# EAGLE board pcb (EAGLE 5.11)
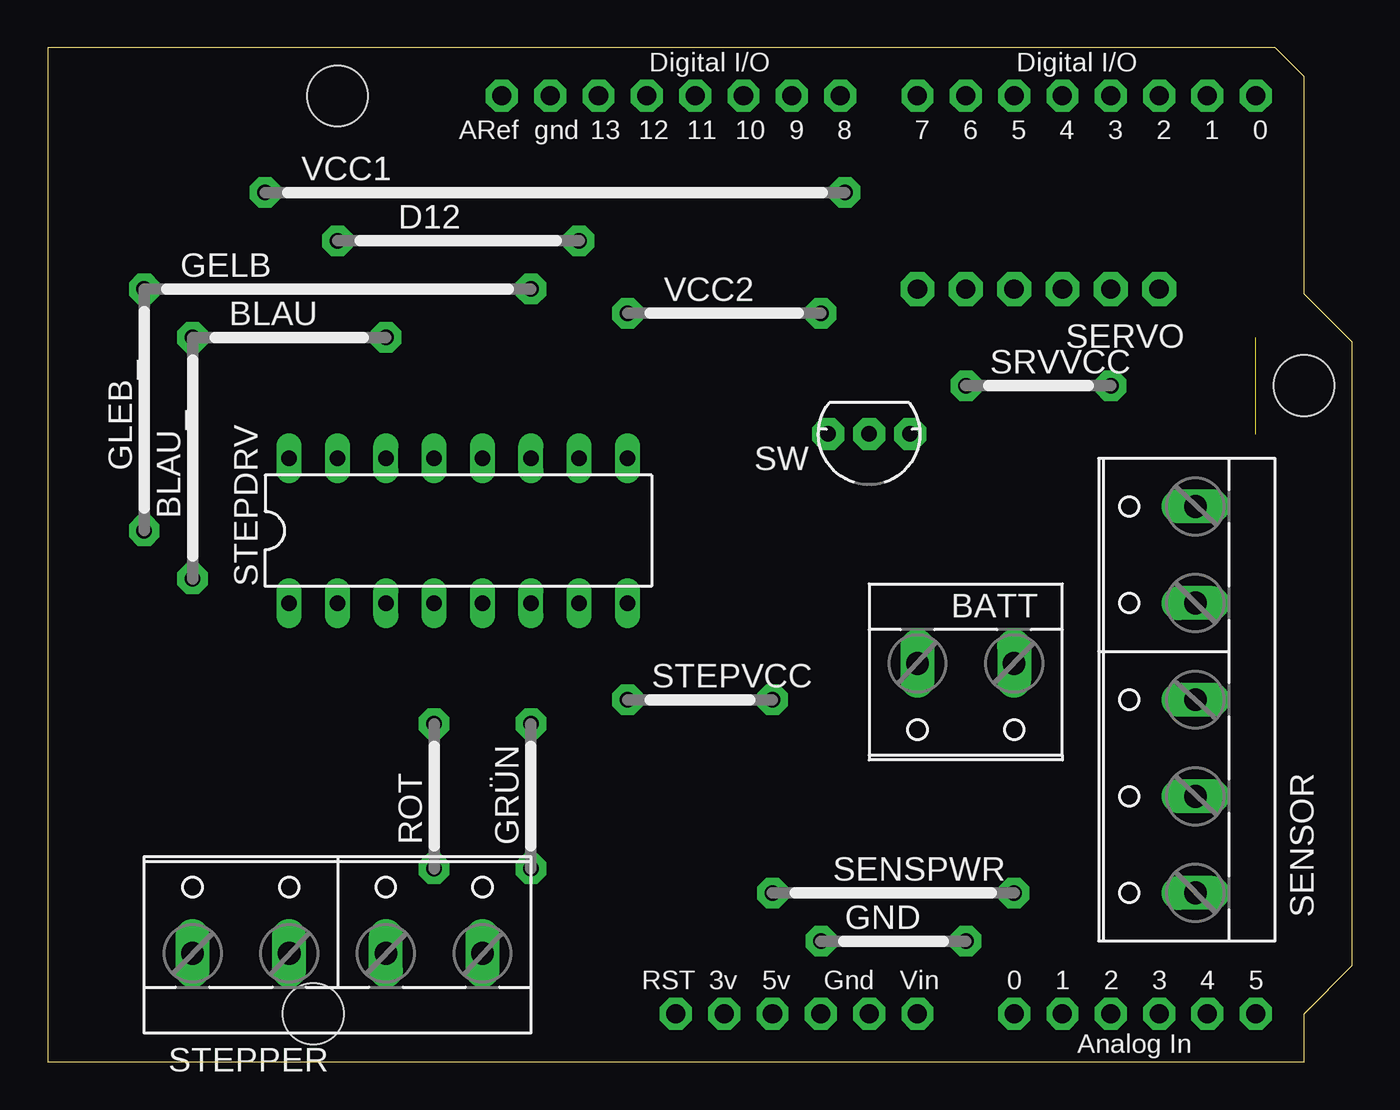
[diagram p0: board, top side]
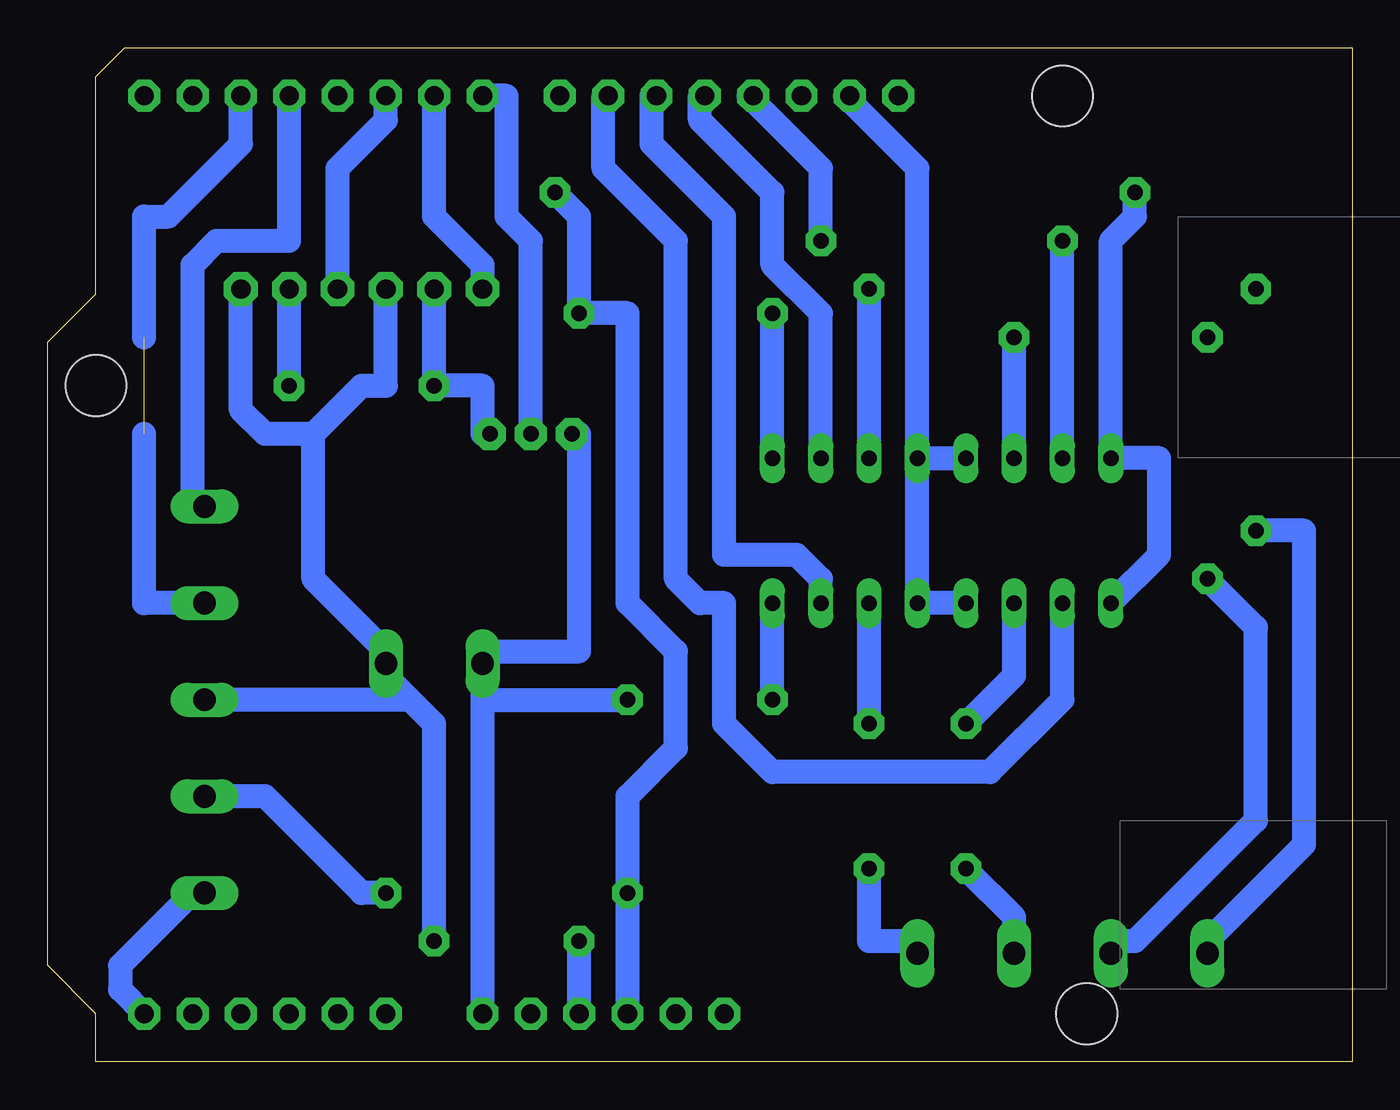
[diagram p1: board, bottom side, seen from below]

Size 68.58 x 53.34 mm. Coordinates in mm from the lower left corner, seen from the top.
Copper layers 1*16: Top 0.035mm / dielectric 1.5mm / Bottom 0.035mm
Design rules "default *": minimum track width 10mil, minimum drill 24mil, track to track 24mil, track to pad 8mil, pad to pad 8mil, via to via 8mil, smd to smd 8mil, copper to edge 40mil, drill to drill 8mil, minimum pad ring 10mil, minimum via ring 8mil, stop-mask expansion 4mil, vias tented up to drill 0mil, thermal gap 10mil

## Footprints (pad centres in the part's own frame; a part is rotated, then mirrored left to right if it is on the bottom)
W237-132 = drill 1.194 long: 1 -2.54,-0.635; 2 2.54,-0.635
10 = drill 0.813 pad 1.6 octagon: 1 -5.08,0; 2 5.08,0
12 = drill 0.813 pad 1.6 octagon: 1 -6.35,0; 2 6.35,0
ARDUINO = drill 1 pad 1.676 octagon: 3V 35.56,2.54; 5V 38.1,2.54; A0 50.8,2.54; A1 53.34,2.54; A2 55.88,2.54; A3 58.42,2.54; A4 60.96,2.54; A5 63.5,2.54; AREF 23.876,50.8; D0 63.5,50.8; D1 60.96,50.8; D2 58.42,50.8; D3 55.88,50.8; D4 53.34,50.8; D5 50.8,50.8; D6 48.26,50.8; D7 45.72,50.8; D8 41.656,50.8; D9 39.116,50.8; D10 36.576,50.8; D11 34.036,50.8; D12 31.496,50.8; D13 28.956,50.8; GND 26.416,50.8; GND1 43.18,2.54; GND2 40.64,2.54; RESET 33.02,2.54; VIN 45.72,2.54 | hole 3.2: 15.24,50.8; 66.04,35.56; 13.97,2.54
20 = drill 0.813 pad 1.6 octagon: 1 -10.16,0; 2 10.16,0
07 = drill 0.813 pad 1.6 octagon: 1 -3.81,0; 2 3.81,0
W237-5P = drill 1.194 long: 1 -10.16,-0.635; 2 -5.08,-0.635; 3 0,-0.635; 4 5.08,-0.635; 5 10.16,-0.635
1X06-CLEANBIG = drill 1.016 pad 1.778 octagon: 1 -6.35,0; 2 -3.81,0; 3 -1.27,0; 4 1.27,0; 5 3.81,0; 6 6.35,0
DIL16 = drill 0.813 long: 1 -8.89,-3.81; 2 -6.35,-3.81; 3 -3.81,-3.81; 4 -1.27,-3.81; 5 1.27,-3.81; 6 3.81,-3.81; 7 6.35,-3.81; 8 8.89,-3.81; 9 8.89,3.81; 10 6.35,3.81; 11 3.81,3.81; 12 1.27,3.81; 13 -1.27,3.81; 14 -3.81,3.81; 15 -6.35,3.81; 16 -8.89,3.81
W237-4P = drill 1.194 long: 1 -7.62,-0.635; 2 -2.54,-0.635; 3 2.54,-0.635; 4 7.62,-0.635
TO92-INLINE = drill 0.813 pad 1.676 octagon: 1 -2.159,0; 2 0,0; 3 2.159,0
30 = drill 0.813 pad 1.6 octagon: 1 -15.24,0; 2 15.24,0

## Placement (x,y rotation side)
BATT  [W237-132]  48.26,20.32 180 top
BLAU  [10]  12.7,38.1 0 top
BLAU_  [12]  7.62,31.75 90 top
D12  [12]  21.59,43.18 0 top
E$1  [ARDUINO]  0,0 0 top
GELB  [20]  15.24,40.64 0 top
GLEB_  [12]  5.08,34.29 90 top
GND  [07]  44.45,6.35 0 top
GRÜN  [07]  25.4,13.97 90 top
ROT  [07]  20.32,13.97 90 top
SENSOR  [W237-5P]  59.69,19.05 90 top
SENSPWR  [12]  44.45,8.89 0 top
SERVO  [1X06-CLEANBIG]  52.07,40.64 180 top
SRVVCC  [07]  52.07,35.56 0 top
STEPDRV  [DIL16]  21.59,27.94 0 top
STEPPER  [W237-4P]  15.24,6.35 0 top
STEPVCC  [07]  34.29,19.05 0 top
SW  [TO92-INLINE]  43.18,33.02 180 top
VCC1  [30]  26.67,45.72 0 top
VCC2  [10]  35.56,39.37 0 top

## Library data of the parts
BATT SENSOR STEPPER = con-wago-508
BLAU BLAU_ D12 GELB GLEB_ GND GRÜN ROT SENSPWR SRVVCC STEPVCC VCC1 VCC2 = jumper
E$1 SERVO SW = adafruit
STEPDRV = 45xx

## Nets
S$1: E$1.D11 STEPDRV.10
S$2: D12.1 STEPDRV.15
S$3: E$1.D10 STEPDRV.7
S$4: BLAU.2 STEPDRV.14
S$5: ROT.2 STEPDRV.3
S$6: D12.2 E$1.D12
S$7: E$1.D9 STEPDRV.2
S$8: STEPDRV.6
S$9: GELB.2 STEPDRV.11
S$10: STEPDRV.1 STEPDRV.16 VCC1.1
S$11: E$1.GND STEPDRV.4 STEPDRV.5 STEPDRV.12 STEPDRV.13
S$12: GRÜN.1 STEPPER.4
S$13: STEPDRV.8 STEPVCC.1
S$14: BATT.2 E$1.VIN STEPVCC.2 SW.3
S$15: ROT.1 STEPPER.3
S$16: GLEB_.1 STEPPER.1
S$17: BLAU_.1 STEPPER.2
S$18: E$1.D6 SERVO.6
S$19: STEPDRV.9 VCC2.1
S$20: E$1.5V VCC1.2 VCC2.2
S$21: E$1.D7 SW.2
S$22: SERVO.5 SRVVCC.1 SW.1
S$23: E$1.D3 SENSOR.5
S$24: E$1.D2 SENSOR.4
S$25: SENSOR.2 SENSPWR.2
S$26: E$1.GND2
S$27: E$1.D5 SERVO.3
S$28: E$1.A5 SENSOR.1
S$29: BATT.1 GND.2 SENSOR.3 SERVO.1 SERVO.4
S$31: SERVO.2 SRVVCC.2

## Tracks (layer width: path | path; a pad name or v marks a point on that pad's centre or on a via)
S$1
  Bottom 1.27: STEPDRV.10 27.94,39.37 30.48,41.91 30.48,45.72 34.29,49.53 34.29,50.8 E$1.D11
S$2
  Bottom 1.27: STEPDRV.15 D12.1
S$3
  Bottom 1.27: STEPDRV.7 27.94,25.4 29.21,26.67 33.02,26.67 33.02,44.45 36.83,48.26 36.83,50.8 E$1.D10
S$4
  Bottom 1.27: STEPDRV.14 BLAU.2
S$5
  Bottom 1.27: STEPDRV.3 17.78,20.32 ROT.2
S$6
  Bottom 1.27: D12.2 27.94,46.99 31.75,50.8 E$1.D12
S$7
  Bottom 1.27: STEPDRV.2 15.24,19.05 19.05,15.24 30.48,15.24 33.02,17.78 33.02,24.13 34.29,24.13 35.56,25.4 35.56,43.18 39.37,46.99 39.37,50.8 E$1.D9
S$8
  Bottom 1.27: 25.4,17.78 STEPDRV.6
S$9
  Bottom 1.27: STEPDRV.11 GELB.2
S$10
  Bottom 1.27: STEPDRV.1 10.16,26.67 10.16,31.75 STEPDRV.16 12.7,43.18 11.43,44.45 VCC1.1
S$11
  Bottom 1.27: STEPDRV.4 STEPDRV.5 STEPDRV.12 | STEPDRV.12 STEPDRV.13 | STEPDRV.12 22.86,46.99 26.67,50.8 E$1.GND
S$12
  Bottom 1.27: GRÜN.1 25.4,6.35 22.86,6.35 STEPPER.4
S$13
  Bottom 1.27: STEPVCC.1 STEPDRV.8
S$14
  Bottom 1.27: E$1.VIN 45.72,19.05 | 45.72,19.05 BATT.2 45.72,21.59 40.64,21.59 40.64,33.02 SW.3 | 45.72,19.05 STEPVCC.2
S$15
  Bottom 1.27: ROT.1 17.78,7.62 STEPPER.3
S$16
  Bottom 1.27: GLEB_.1 2.54,27.94 2.54,11.43 7.62,6.35 STEPPER.1
S$17
  Bottom 1.27: BLAU_.1 5.08,22.86 5.08,12.7 11.43,6.35 12.7,6.35 STEPPER.2
S$18
  Bottom 1.27: E$1.D6 48.26,44.45 45.72,41.91 SERVO.6
S$19
  Bottom 1.27: STEPDRV.9 VCC2.1
S$20
  Bottom 1.27: E$1.5V 38.1,8.89 38.1,13.97 35.56,16.51 35.56,21.59 38.1,24.13 38.1,39.37 VCC2.2 40.64,44.45 VCC1.2
S$21
  Bottom 1.27: SW.2 43.18,43.18 44.45,44.45 44.45,50.8 E$1.D7
S$22
  Bottom 1.27: SW.1 45.72,33.02 45.72,35.56 SRVVCC.1 SERVO.5
S$23
  Bottom 1.27: SENSOR.5 60.96,29.21 60.96,41.91 59.69,43.18 55.88,43.18 E$1.D3
S$24  (1 unrouted)
  Bottom 1.27: 63.5,33.02 63.5,24.13 SENSOR.4 | 63.5,38.1 63.5,44.45 62.23,44.45 58.42,48.26 E$1.D2
S$25
  Bottom 1.27: SENSPWR.2 52.07,8.89 57.15,13.97 SENSOR.2
S$26
  Bottom 1.27: E$1.GND2 40.64,6.35
S$27
  Bottom 1.27: SERVO.3 53.34,46.99 50.8,49.53 E$1.D5
S$28
  Bottom 1.27: E$1.A5 64.77,3.81 64.77,5.08 60.96,8.89 SENSOR.1
S$29
  Bottom 1.27: SERVO.4 50.8,35.56 52.07,35.56 54.61,33.02 | 54.61,33.02 57.15,33.02 58.42,34.29 SERVO.1 | 54.61,33.02 54.61,25.4 50.8,21.59 BATT.1 50.8,20.32 49.53,19.05 | 49.53,19.05 48.26,17.78 GND.2 | 49.53,19.05 SENSOR.3
S$31
  Bottom 1.27: SRVVCC.2 SERVO.2